# Altium PCB 0.96_OLED_2020-09-11_12-11-13.pcbdoc
Units mm, origin at the board's own origin, x right, y up, seen from the top; angles counter-clockwise.
Board outline 54.1 x 53.71 mm, 2 copper layers (Top Layer, Bottom Layer); 1 components, 0 nets, 8 pads, 0 vias.
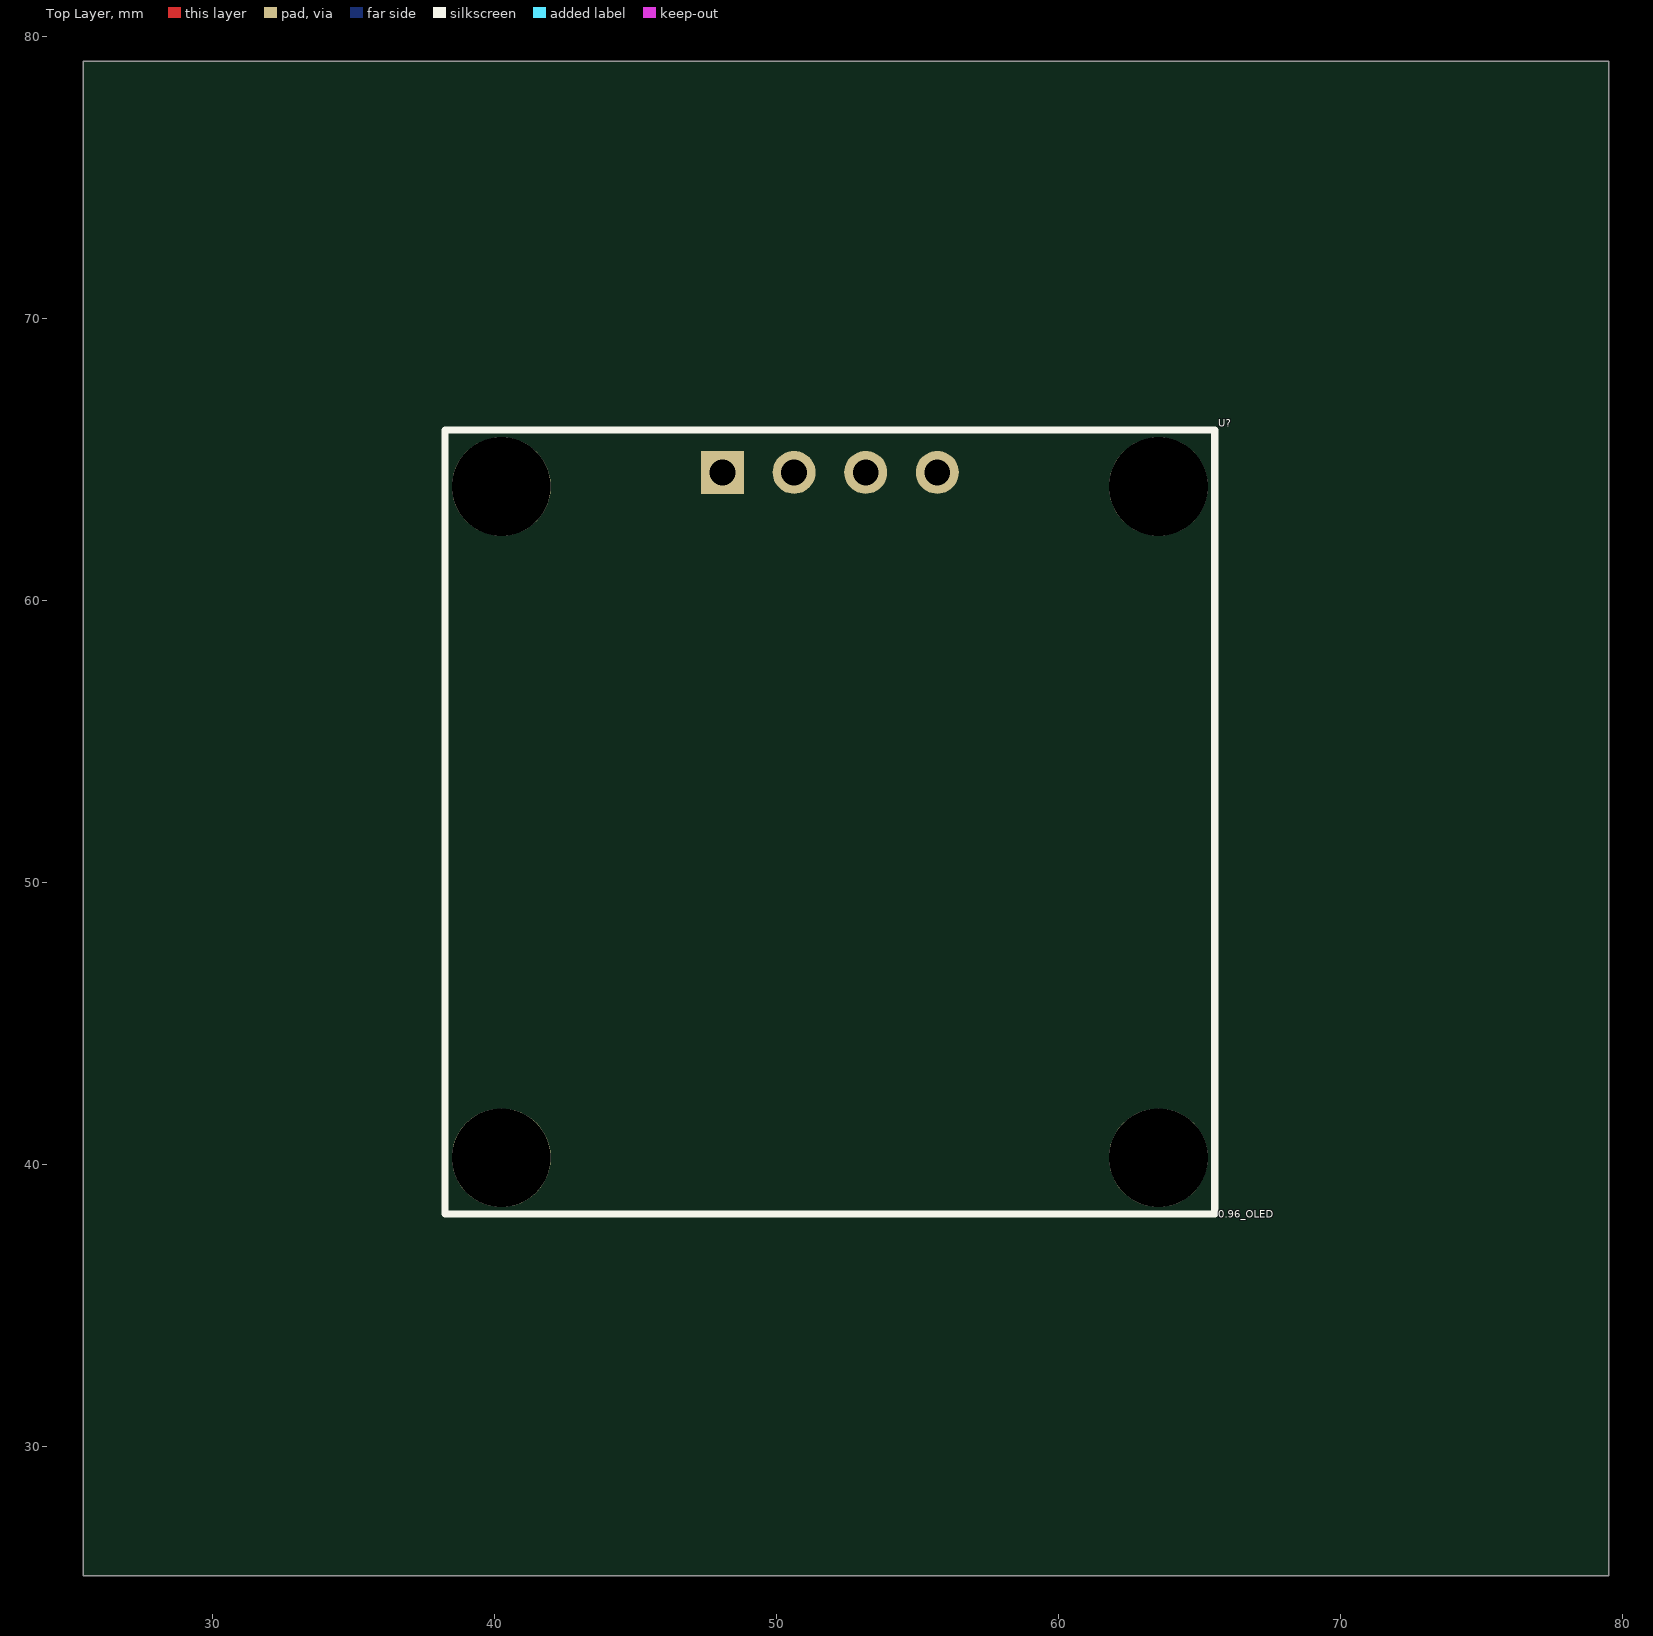
[diagram p0: Top Layer view]
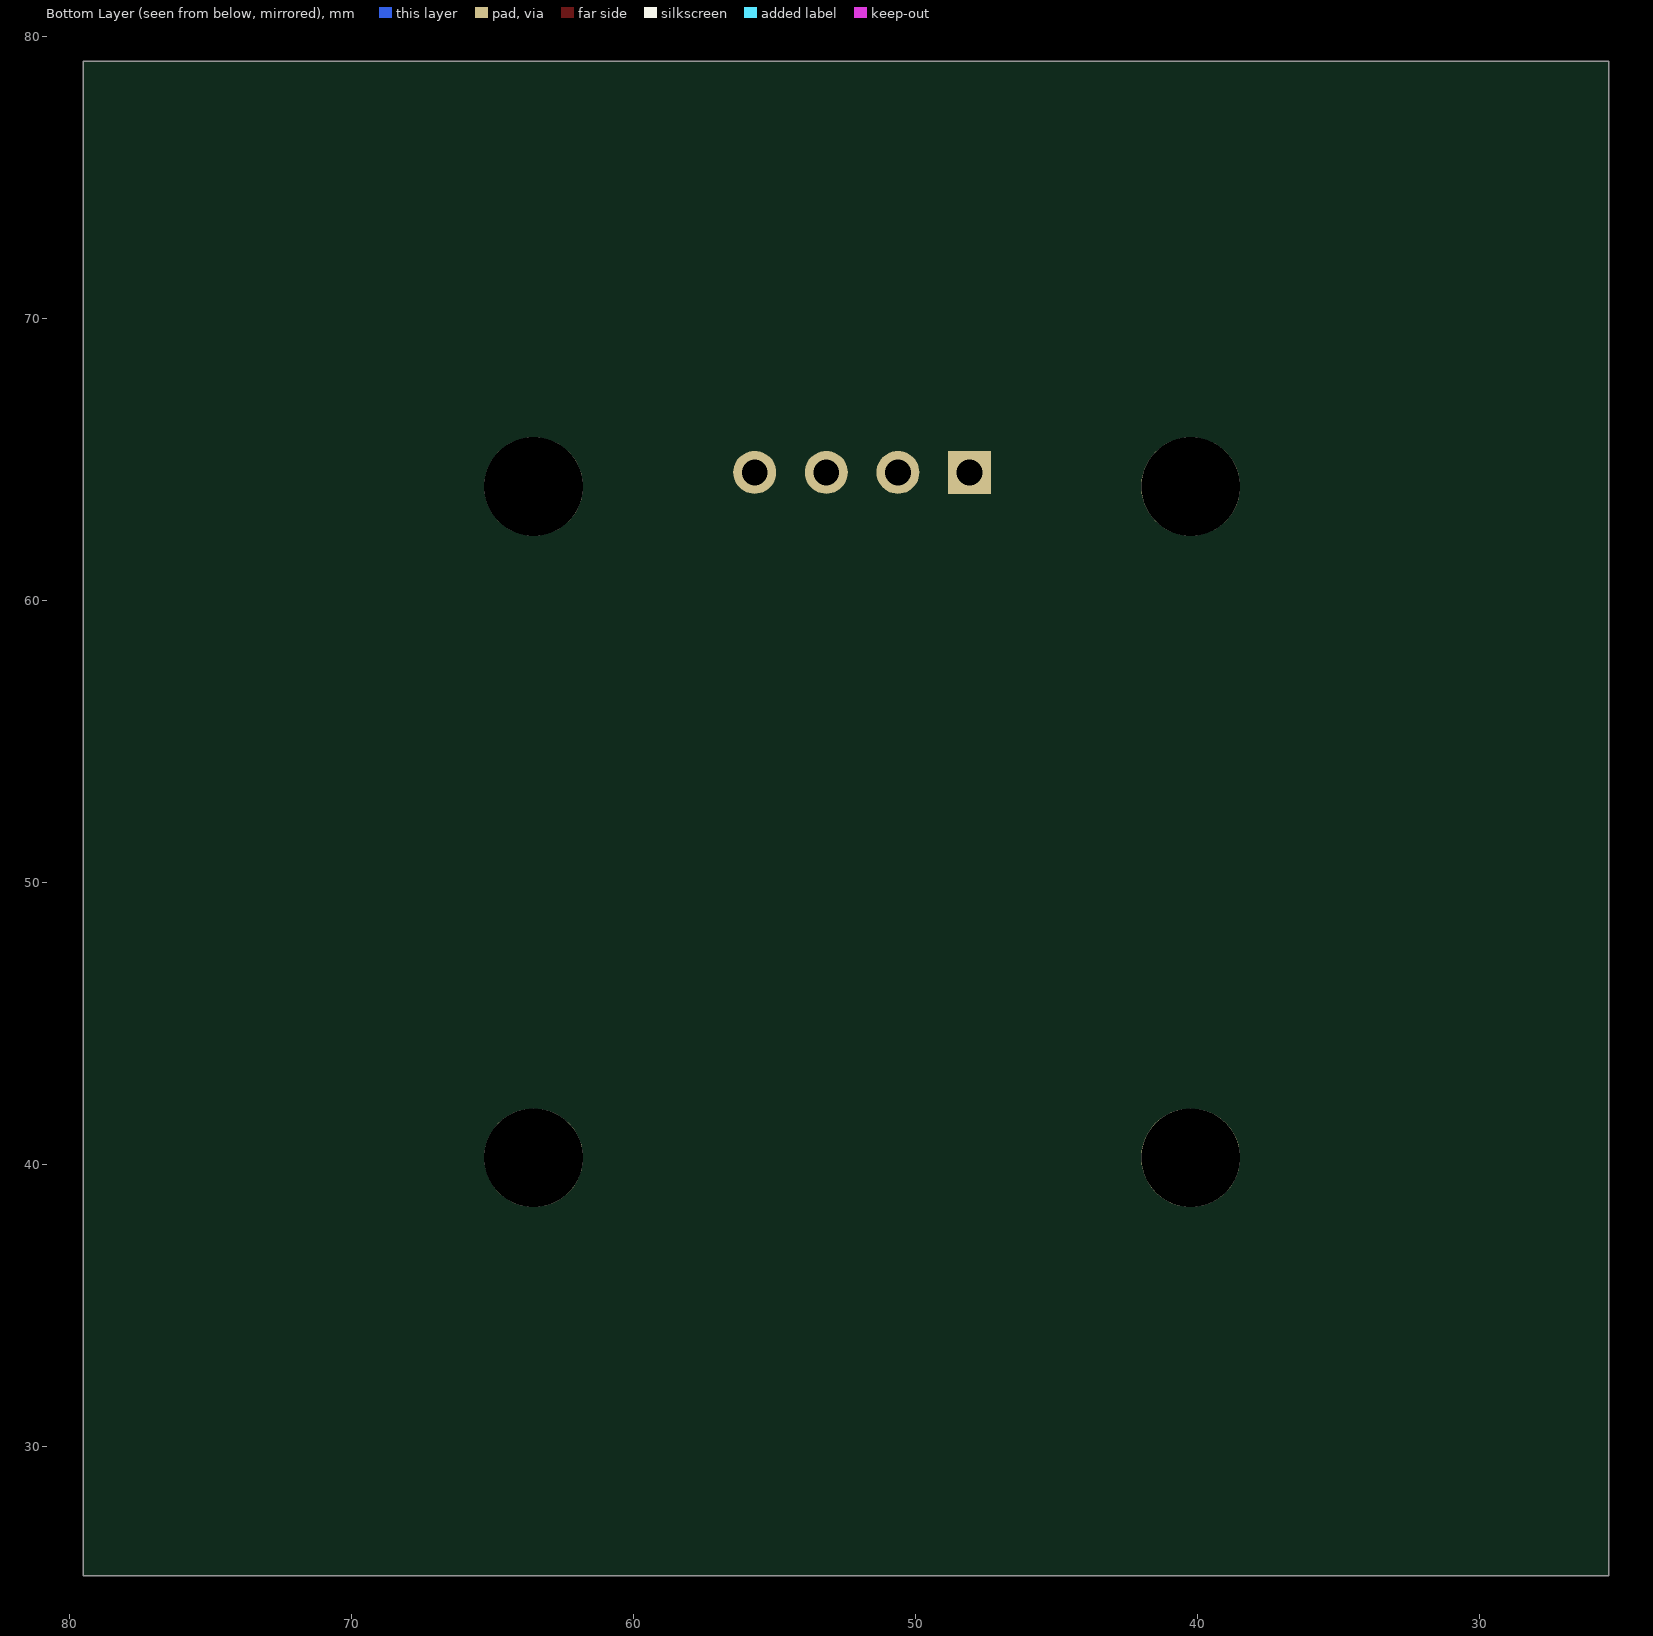
[diagram p1: Bottom Layer view, seen from below]

## Layer stack, top to bottom
Top Layer: signal copper (thickness not stored)
Dielectric: dielectric 0.32, FR-4, Dk 4.8
Bottom Layer: signal copper (thickness not stored)

## Board outline
79.497,25.4 25.4,25.4 25.4,79.108 79.497,79.108

## Components (designator, comment, footprint, x,y, rotation, side; value= is the part's Value field where it differs from the comment)
U? "0.96_OLED" 0.96_OLED 51.877,52.127 r0 top

## Footprints (in the part's own frame and the unit in brackets; to place one, negate y for a bottom-side part, rotate by r counter-clockwise, add the part's x,y. Pads: shape width x height; smd on the part's side, far side on the other; paste and mask are expansions set on the pad)
0.96_OLED [mil]
  rect 60x60 hole 36: 1(-150,488.19)
  round 60 hole 36: 2(-50,488.19) 3(50,488.19) 4(150,488.19)
  round 137.8 hole 137.8 unplated: ""(-458.66,-468.5) ""(-458.66,468.5) ""(458.66,-468.5) ""(458.66,468.5)
  silkscreen extent -537,-547 537,547

## Nets (pads, with @x,y where several pads share a name; then routed paths per layer and width w, separated by ;. In a path a pad name is that pad's centre, name@x,y a point inside that pad or via, vN(x,y) a via of type N, cw(c..) or ccw(c..) an arc to the next point about the centre after c; other vN are vias at no path point)
pads on no net: U?. U?.1 U?.2 U?.3 U?.4